# Altium PCB Rascal.PcbDoc (part 1 of 3)
Units mm, origin at the board's own origin, x right, y up, seen from the top; angles counter-clockwise.
Board outline 120.65 x 53.34 mm, 4 copper layers (Top Layer, Ground Plane, Power Plane, Bottom Layer); 125 components, 215 nets, 799 pads, 528 vias.
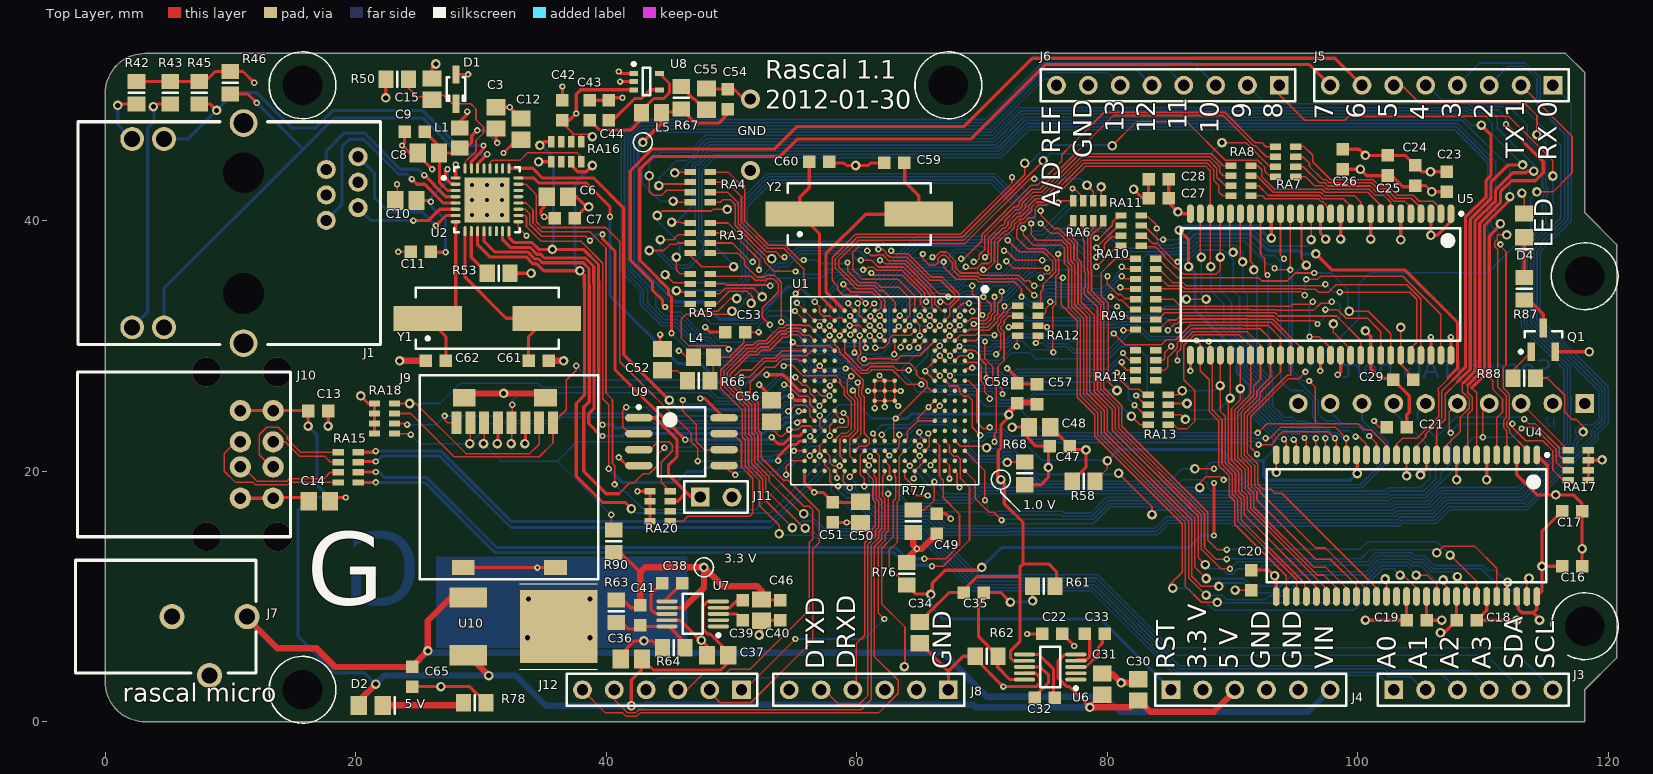
[diagram p0: Top Layer view]
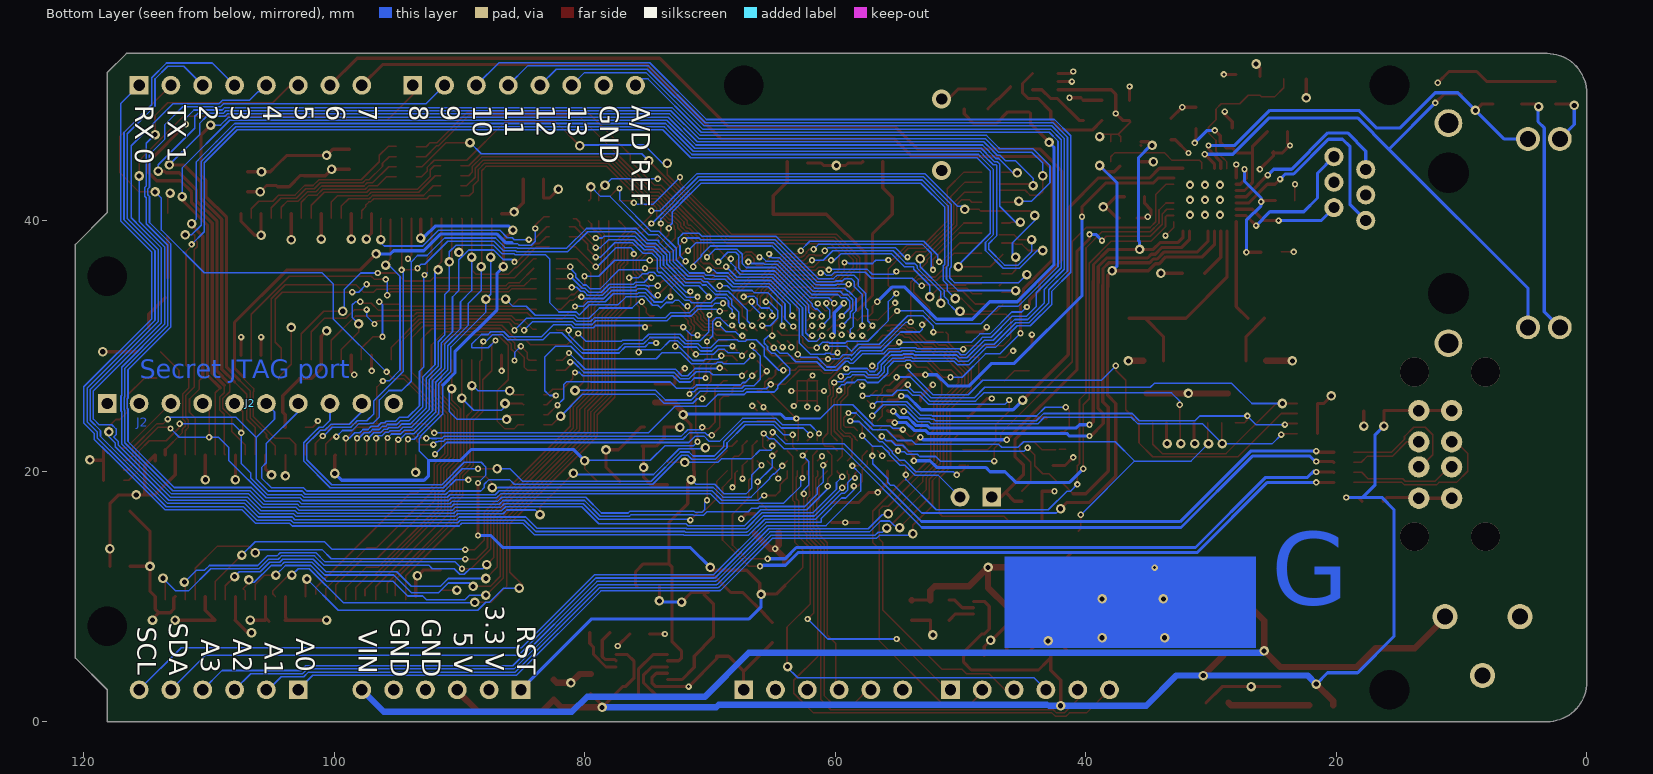
[diagram p1: Bottom Layer view, seen from below]
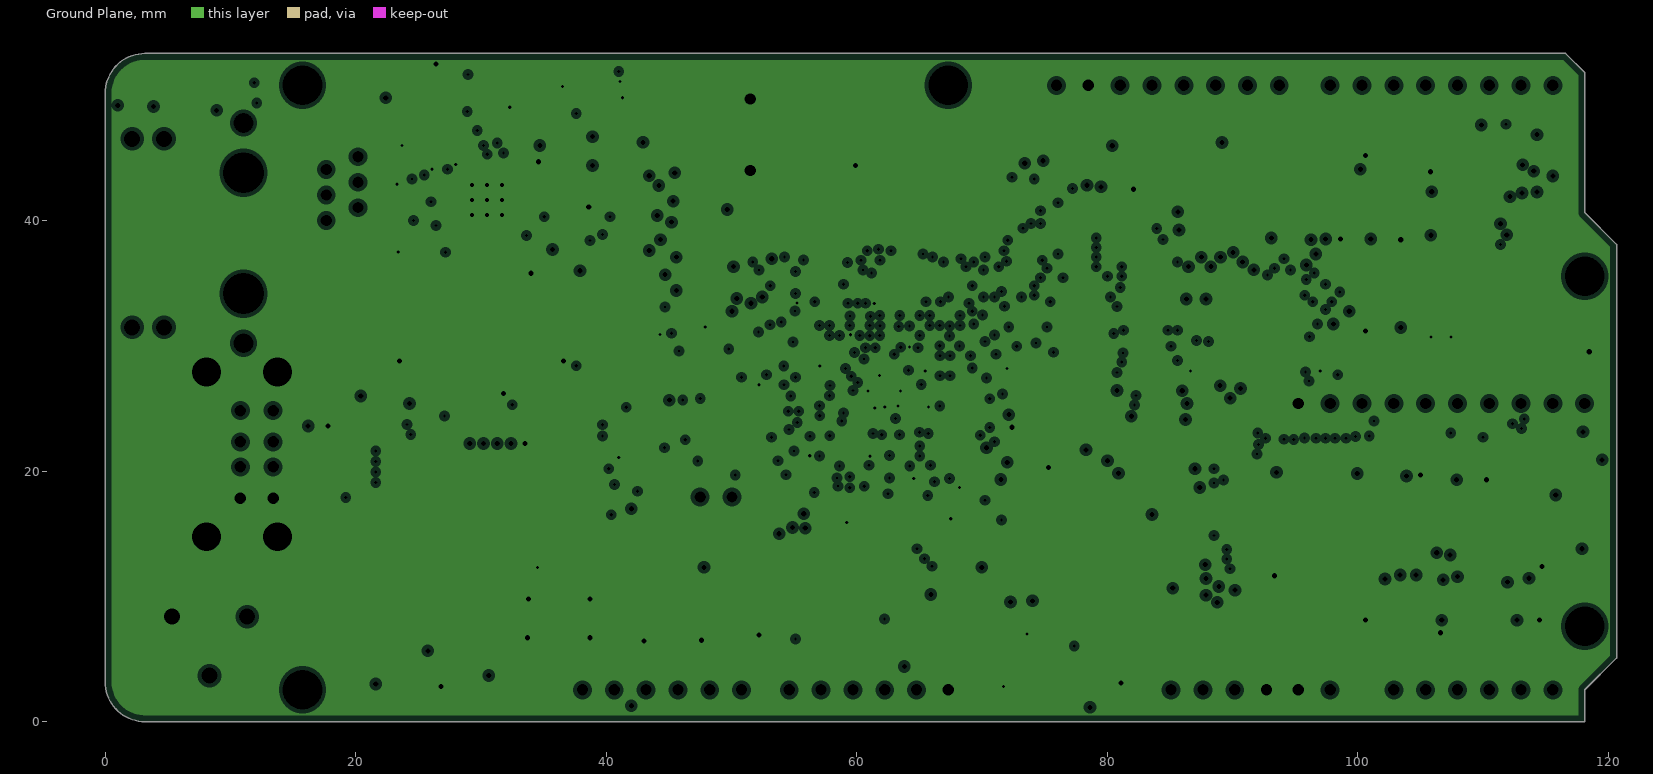
[diagram p2: Ground Plane, clearances drawn from the general rule]
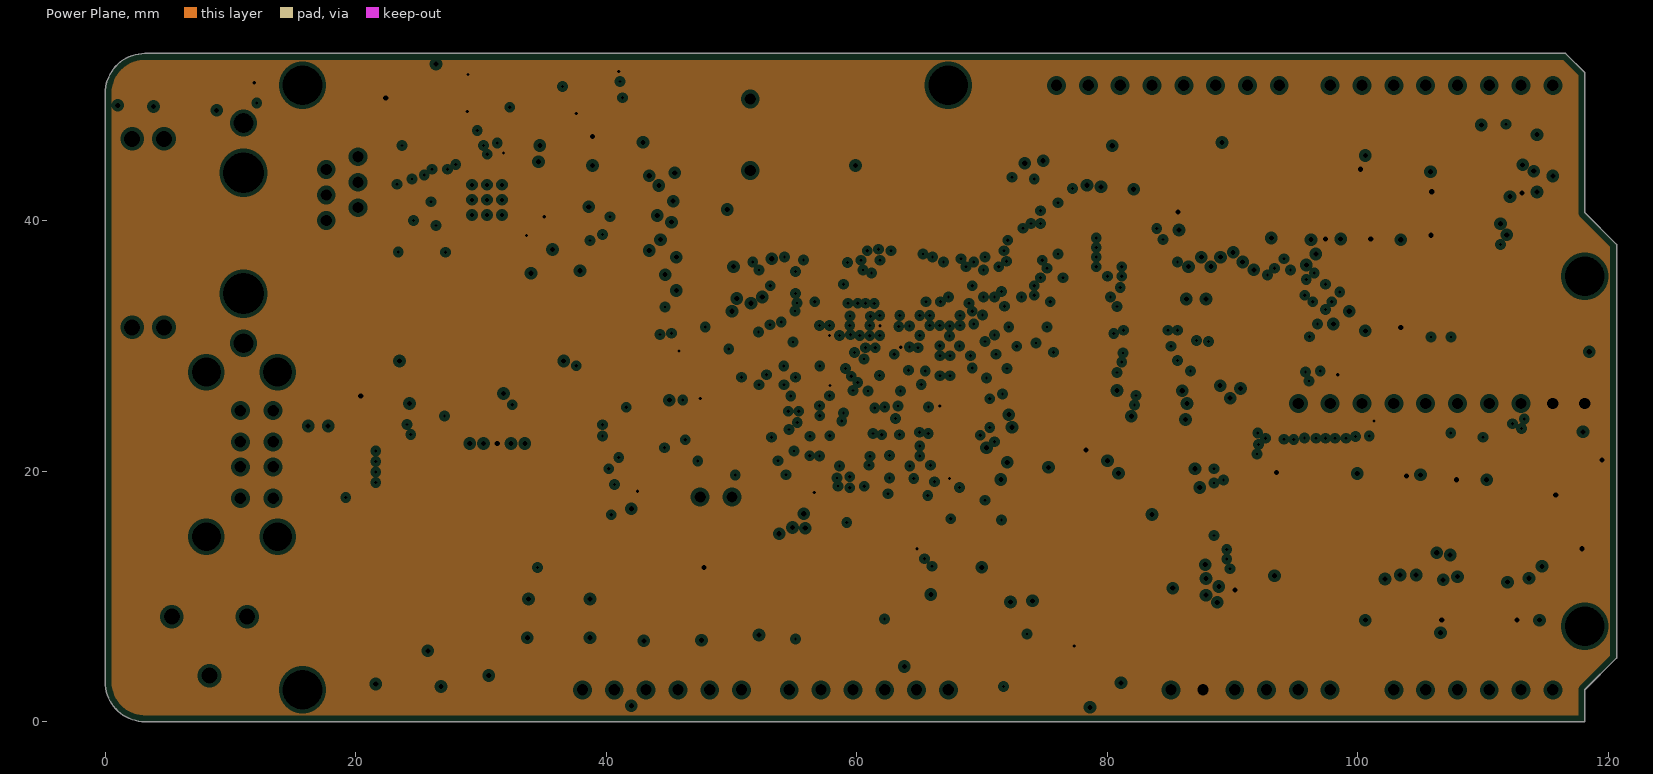
[diagram p3: Power Plane, clearances drawn from the general rule]

## Layer stack, top to bottom
Top Layer: signal copper 0.0356
Dielectric: core 0.32, FR-4, Dk 4.8
Ground Plane: plane copper 0.0356, net GND
Dielectric: prepreg 0.32, FR-4, Dk 4.8
Power Plane: plane copper 0.0356, net 3V3
Dielectric: core 0.32, FR-4, Dk 4.8
Bottom Layer: signal copper 0.0356

## Board outline
0,3.175 ccw(c3.175,3.175) 3.175,0 118.11,0 118.11,2.54 120.65,5.08 120.65,38.1 118.11,40.64 118.11,51.816 116.586,53.34 3.175,53.34 3.175,53.341 ccw(c3.175,50.166) 0,50.166

## Design rules (kind name [scope] priority, off if disabled: settings)
AssemblyTestPointUsage [All] p1: valid=2
AssemblyTestpoint [All] p1: testpointundercomponent=TRUE minsize=1.016 maxsize=2.54 preferedsize=1.524 minholesize=0 maxholesize=1.016 preferedholesize=0.813 testpointgrid=0.025 usegrid=FALSE gridtolerance=0 allowsidetop=TRUE allowsidebottom=TRUE
Clearance "Clearance~Sunstone Circuits" [All] p1: gap=0.127 // Sunstone Circuits Minimum Clearance Rule (MLB~4&6 Layer Designs)
FabricationTestPointUsage [All] p1: valid=2 allowmultiple=FALSE
FabricationTestpoint [All] p1: side=3 testpointundercomponent=TRUE minsize=1.016 maxsize=2.54 preferedsize=1.524 minholesize=0 maxholesize=2.54 preferedholesize=0.813 testpointgrid=0.025 allowsidetop=TRUE allowsidebottom=TRUE usegrid=FALSE gridtolerance=0
HoleSize "HoleSize~Sunstone Circuits" [All] p1: absolutevalues=TRUE maxlimit=6.375 minlimit=0.102 maxpercent=80.000 minpercent=20.000 // Sunstone Circuits Hole Size Rule (MLB~4&6 Layer Designs)
HoleSize Testpoint [All] p2: absolutevalues=TRUE maxlimit=2.54 minlimit=0.025 maxpercent=80.000 minpercent=20.000
HoleSize TestPointUsage [All] p3: absolutevalues=TRUE maxlimit=2.54 minlimit=0.025 maxpercent=80.000 minpercent=20.000
MinimumAnnularRing "MinimumAnnularRing~Sunstone Circuits" [All] p1: minimumring=0.127 // Sunstone Circuits Minimum Annular Ring (MLB~4&6 Layer Designs)
MinimumSolderMaskSliver [All] p1: minsoldermaskwidth=0.102
PlaneClearance "PlaneClearance~Sunstone Circuits" [All] p1: clearance=0.305 // Sunstone Circuits Power Plane Clearance Rule (MLB~4&6 Layer Designs)
PlaneConnect "PlaneConnect~Sunstone Circuits" [All] p1: planeconnectstyle=Relief reliefexpansion=0.254 reliefentries=4 reliefconductorwidth=0.203 reliefairgap=0.254 // Sunstone Circuits Power Plane Connect Rule (MLB~4&6 Layer Designs)
PolygonConnect "PolygonConnect~Sunstone Circuits" [All] p1: connectstyle=Relief reliefconductorwidth=0.203 reliefentries=4 polygonreliefangle="90 Angle" // Sunstone Circuits Polygon Connect Style (MLB~4&6 Layer Designs)
RoomDefinition BGARoom [(InComponent('U1'))] p1: confinementstyle=ConfineIn formatcopy=TRUE lockcomponents=FALSE outline 71.882,18.669 54.483,18.669 54.483,36.195 71.882,36.195
RoutingVias "RoutingVias~Sunstone Circuits" [All] p1: holewidth=0.152 width=0.432 viastyle="Through Hole" minholewidth=0.152 minwidth=0.432 maxholewidth=0.508 maxwidth=1.016 // Sunstone Circuits Routing Vias Rule (MLB~4&6 Layer Designs)
ShortCircuit "ShortCircuit~Sunstone Circuits" [All] p1: allowed=FALSE // Sunstone Circuits Short Circuit Rule~Do Not Allow (MLB~4&6 Layer Designs)
SilkscreenOverComponentPads [All] p1: minsilkscreentomaskgap=0.127
SolderMaskExpansion SolderMaskExpansion_ViasUnderBGA [WithinRoom(BGARoom) And (IsVia)] p1: expansion=-0.279
SolderMaskExpansion [All] p2: expansion=0.064 // Sunstone Circuits Solder Mask Expansion Rule (MLB~4&6 Layer Designs)
ViasUnderSMD "ViasUnderSMD~Sunstone Circuits" [All] p1: allowed=FALSE // Sunstone Circuits Vias Under SMD~Do Not Allow (MLB~4&6 Layer Designs)
Width "Width~Sunstone Circuits" [All] p1: maxlimit=2.54 minlimit=0.076 preferedwidth=0.127 // Sunstone Circuits Minimum Width Rule (MLB~4&6 Layer Designs)
18 further rules are at their usual default settings.

## Components (designator, comment, footprint, x,y, rotation, side; value= is the part's Value field where it differs from the comment)
C3 "Cap" CAPC2012N 31.2,48.2 r90 top
C6 "Cap" CAPC2012N 36.1,41.9 r0 top
C7 "Cap" CAPC1608N 36.7,40.2 r0 top
C8 "Cap" CAPC2012N 25.8,45.4 r180 top
C9 "Cap" CAPC1608N 24.7,47.1 r180 top
C10 "Cap" CAPC2012N 24,41.6 r180 top
C11 "Cap" CAPC1608N 25.2,37.5 r180 top
C12 "Cap" CAPC2012N 33.2,47.3 r90 top
C13 "Cap" CAPC1608N 17,24.8 r180 top
C14 "Cap" CAPC2012N 17.1,17.6 r0 top
C15 "Cap" CAPC2012N 26.1,50.5 r90 top
C16 "Cap" CAPC1608N 117.1,12.4 r180 top
C17 "Cap" CAPC1608N 117.1,16.8 r180 top
C18 "Cap" CAPC1608N 108.7,8.1 r180 top
C19 "Cap" CAPC1608N 104.7,8.1 r180 top
C20 "Cap" CAPC1608N 91.5,11.3 r90 top
C21 "Cap" CAPC1608N 103.1,23.5 r0 top
C22 "Cap" CAPC1608N 75.6,7 r180 top
C23 "Cap" CAPC1608N 107.1,43.1 r90 top
C24 "Cap" CAPC1608N 104.6,43.6 r90 top
C25 "Cap" CAPC1608N 102.4,44.4 r90 top
C26 "Cap" CAPC1608N 98.8,44.9 r90 top
C27 "Cap" CAPC1608N 84.1,41.8 r180 top
C28 "Cap" CAPC1608N 84.1,43.3 r180 top
C29 "Cap" CAPC1608N 103.632,27.3 r180 top
C30 "Cap" CAPC2012N 82.476,2.54 r90 top
C31 "Cap" CAPC2012N 79.6,3 r90 top
C32 "Cap" CAPC1608N 75,1.9 r0 top
C33 "Cap" CAPC1608N 79,7 r180 top
C34 "Cap" CAPC2012N 65.024,7.112 r270 top
C35 "Cap" CAPC1608N 69.342,10.308 r0 top
C36 "Cap" CAPC2012N 42,5 r180 top
C37 "Cap" CAPC2012N 48.9,5.3 r180 top
C38 "Cap" CAPC1608N 45.267,11.059 r0 top
C39 "Cap" CAPC1608N 50.9,8.9 r90 top
C40 "Cap" CAPC2012N 52.4,8.9 r270 top
C41 "Cap" CAPC1608N 42.7,8.5 r270 top
C42 "Cap" CAPC1608N 36.5,48.8 r90 top
C43 "Cap" CAPC1608N 38.7,48.8 r90 top
C44 "Cap" CAPC1608N 40.2,48.8 r90 top
C46 "Cap" CAPC1608N 53.9,8.9 r270 top
C47 "Cap" CAPC1608N 76.2,22 r0 top
C48 "Cap" CAPC2012N 74.6,23.5 r0 top
C49 "Cap" CAPC1608N 66.4,15.8 r270 top
C50 "Cap" CAPC2012N 60.3,16.7 r90 top
C51 "Cap" CAPC1608N 58.1,16.7 r90 top
C52 "Cap" CAPC2012N 44.5,28.9 r270 top
C53 "Cap" CAPC1608N 50.3,31.1 r0 top
C54 "Cap" CAPC1608N 49.7,49.7 r270 top
C55 "Cap" CAPC2012N 48,49.7 r270 top
C56 "Cap" CAPC2012N 53.2,24.8 r270 top
C57 "Cap" CAPC1608N 74.388,26.15 r270 top
C58 "Cap" CAPC1608N 72.8,26.2 r270 top
C59 "Cap" CAPC1608N 63,44.6 r0 top
C60 "Cap" CAPC1608N 57,44.7 r180 top
C61 "Cap" CAPC1608N 34.6,28.8 r0 top
C62 "Cap" CAPC1608N 26.4,28.8 r180 top
C65 "Cap" CAPC1608N 24.5,3.6 r90 top
D1 "Diode 1N4148" SOD-323 28,50.5 r270 top
D2 "LED2" CD2012-0805 21.2,1.3 r0 top
D4 "LED" CD2012-0805 113.284,39.624 r270 top
J1 "L829-1X1T-91" "BEL L829-1X1T-91" 11.045,39 r90 top locked
J2 "ARM JTAG HEADER" HDR1X10 118.11,25.4 r180 bottom locked
J3 "ARDUINO_ANALOG_IN" HDR1X6 102.87,2.54 r0 top locked
J4 "ARDUINO_SHIELD_POWER" HDR1X6 85.09,2.54 r0 top locked
J5 "ARDUINO_DIGITAL_LOW_BYTE" HDR1X8 115.57,50.8 r180 top locked
J6 "ARDUINO_DIGITAL_HIGH_BYTE" HDR1X8 93.726,50.8 r180 top locked
J7 "Center-positive 2.1 mm power jack" PJ-102AH 11.328,8.382 r90 top locked
J8 "SERIAL DEBUG PORT" HDR1X6 67.31,2.54 r180 top
J9 "MICROSD_SOCKET" "JAE SJ107021" 31.9,12.3 r270 top locked
J10 "72309-8034BLF" 72309-8034BLF -2.2,21.336 r270 top locked
J11 "Serial flash CS enable" HDR1X2 47.498,17.928 r0 top
J12 "SSC PORT" HDR1X6 50.8,2.54 r180 top
L1 "Inductor" INDC2012L 28.3,46.6 r270 top
L4 "Inductor" INDC2012L 47.756,29.1 r0 top
L5 "Inductor" INDC2012L 43.6,48.6 r0 top
Q1 "2N3904" SOT23-3N 114.808,30.48 r90 top
R42 "Res3" RESC2012N 2.5,50.2 r90 top
R43 "Res3" RESC2012N 5.2,50.2 r90 top
R45 "Res3" RESC2012N 7.5,50.2 r90 top
R46 "Res3" RESC2012N 10,51 r90 top
R50 "Res3" RESC2012N 23.3,51.3 r180 top
R53 "Res3" RESC2012N 31.4,35.8 r0 top
R58 "Res3" RESC2012N 78.1,19.198 r0 top
R61 "Res3" RESC2012N 74.93,10.816 r180 top
R62 "Res3" RESC2012N 70.358,5.228 r180 top
R63 "Res3" RESC2012N 40.8,8.8 r270 top
R64 "Res3" RESC2012N 45.4,5.9 r180 top
R66 "Res3" RESC2012N 47.4,27.2 r180 top
R67 "Res3" RESC2012N 46,49.8 r90 top
R68 "Res3" RESC2012N 73.406,19.812 r90 top
R76 "Res3" RESC2012N 64,11.8 r270 top
R77 "Res3" RESC2012N 64.5,16 r90 top
R78 "Res3" RESC2012N 29.5,1.5 r0 top
R87 "Res3" RESC2012N 113.284,34.544 r270 top
R88 "Res3" RESC2012N 113.284,27.432 r180 top
R90 "Res3" RESC2012N 40.6,14.4 r90 top
RA3 "RESISTOR ARRAY" 742C083 47.498,38.608 r90 top
RA4 "RESISTOR ARRAY" 742C083 47.498,42.672 r90 top
RA5 "RESISTOR ARRAY" 742C083 47.498,34.544 r90 top
RA6 "RESISTOR ARRAY" 742C083 78.486,40.788 r180 top
RA7 "RESISTOR ARRAY" 742C083 94.234,44.704 r270 top
RA8 "RESISTOR ARRAY" 742C083 90.678,43.18 r270 top
RA9 "RESISTOR ARRAY" 742C083 83.058,32.512 r270 top
RA10 "RESISTOR ARRAY" 742C083 83.058,35.744 r270 top
RA11 "RESISTOR ARRAY" 742C083 81.9,39.2 r270 top
RA12 "RESISTOR ARRAY" 742C083 73.66,32.004 r270 top
RA13 "RESISTOR ARRAY" 742C083 84.074,24.892 r270 top
RA14 "RESISTOR ARRAY" 742C083 83.058,28.448 r270 top
RA15 "RESISTOR ARRAY" 742C083 19.4,20.3 r270 top
RA16 "RESISTOR ARRAY" 742C083 36.8,45.5 r180 top
RA17 "RESISTOR ARRAY" 742C083 117.602,20.468 r90 top
RA18 "RESISTOR ARRAY" 742C083 22.3,24.2 r270 top
RA20 "RESISTOR ARRAY" 742C083 44.3,17.2 r270 top
U1 "AT91SAM9G20B-CU" AT91SAM9G20-CU 62.23,26.416 r270 top locked
U2 "KSZ8051RNL" QFN50P500X500-32VBN 30.48,41.656 r0 top
U4 "MT48LCxxMxxA2x-xx" TSOP2-54_N 103.886,15.642 r270 top locked
U5 "MT48LCxxMxxA2x-xx" TSOP2-54_N 97.028,34.9 r270 top locked
U6 "TPS60500" TSSOP50P490-10AN 75.438,4.364 r180 top
U7 "TPS60500" TSSOP50P490-10AN 46.9,8.6 r180 top
U8 "TPS717xx" SOT353-5AN 43.222,51.094 r0 top
U9 "MX25L3205D" SOP127P780-8N 46,22.352 r0 top locked
U10 "Volt Reg" DPAK-3 29,7.6 r270 top
Y1 "XTAL" HC49/4H_SMX 30.5,32.2 r0 top
Y2 "18.432 MHz" HC49/4H_SMX 60.198,40.513 r0 top

## Footprints (in the part's own frame and the unit in brackets; to place one, negate y for a bottom-side part, rotate by r counter-clockwise, add the part's x,y. Pads: shape width x height; smd on the part's side, far side on the other; paste and mask are expansions set on the pad)
742C083 [mm] "Resistor array"
  rect 0.5x0.9 smd mask+0.025: 1(-1.2,-0.8) 2(-0.4,-0.8) 3(0.4,-0.8) 4(1.2,-0.8) 5(1.2,0.8) 6(0.4,0.8) 7(-0.4,0.8) 8(-1.2,0.8)
72309-8034BLF [mm] "USB doubler decker jack"
  round 1.7 hole 0.92: 1(-3.5,15.61) 2(-1,15.61) 3(1,15.61) 4(3.5,15.61) 5(-3.5,12.99) 6(-1,12.99) 7(1,12.99) 8(3.5,12.99)
  silkscreen extent -6.57,0 6.57,17, body extent -6.5,0 6.5,17, height 15.5
AT91SAM9G20-CU [mil] "217-ball, 15 x 15 mm LFBGA package, 0.8 mm pitch"
  round 14 smd mask-1.09: A1(-251.97,251.97) A2(-220.47,251.97) A3(-188.98,251.97) A4(-157.48,251.97) A5(-125.98,251.97) A6(-94.49,251.97) A7(-62.99,251.97) A8(-31.5,251.97) A9(0,251.97) A10(31.5,251.97) A11(62.99,251.97) A12(94.49,251.97) A13(125.98,251.97) A14(157.48,251.97) A15(188.98,251.97) A16(220.47,251.97) A17(251.97,251.97) B1(-251.97,220.47) B2(-220.47,220.47) B3(-188.98,220.47) B4(-157.48,220.47) B5(-125.98,220.47) B6(-94.49,220.47) B7(-62.99,220.47) B8(-31.5,220.47) B9(0,220.47) B10(31.5,220.47) B11(62.99,220.47) B12(94.49,220.47) B13(125.98,220.47) B14(157.48,220.47) B15(188.98,220.47) B16(220.47,220.47) B17(251.97,220.47) C1(-251.97,188.98) C2(-220.47,188.98) C3(-188.98,188.98) C4(-157.48,188.98) C5(-125.98,188.98) C6(-94.49,188.98) C7(-62.99,188.98) C8(-31.5,188.98) C9(0,188.98) C10(31.5,188.98) C11(62.99,188.98) C12(94.49,188.98) C13(125.98,188.98) C14(157.48,188.98) C15(188.98,188.98) C16(220.47,188.98) C17(251.97,188.98) D1(-251.97,157.48) D2(-220.47,157.48) D3(-188.98,157.48) D4(-157.48,157.48) D5(-125.98,157.48) D6(-94.49,157.48) D7(-62.99,157.48) D8(-31.5,157.48) D9(0,157.48) D10(31.5,157.48) D11(62.99,157.48) D12(94.49,157.48) D13(125.98,157.48) D14(157.48,157.48) D15(188.98,157.48) D16(220.47,157.48) D17(251.97,157.48) E1(-251.97,125.98) E2(-220.47,125.98) E3(-188.98,125.98) E4(-157.48,125.98) E14(157.48,125.98) E15(188.98,125.98) E16(220.47,125.98) E17(251.97,125.98) F1(-251.97,94.49) F2(-220.47,94.49) F3(-188.98,94.49) F4(-157.48,94.49) F14(157.48,94.49) F15(188.98,94.49) F16(220.47,94.49) F17(251.97,94.49) G1(-251.97,62.99) G2(-220.47,62.99) G3(-188.98,62.99) G4(-157.48,62.99) G14(157.48,62.99) G15(188.98,62.99) G16(220.47,62.99) G17(251.97,62.99) H1(-251.97,31.5) H2(-220.47,31.5) H3(-188.98,31.5) H4(-157.48,31.5) H8(-31.5,31.5) H9(0,31.5) H10(31.5,31.5) H14(157.48,31.5) H15(188.98,31.5) H16(220.47,31.5) H17(251.97,31.5) J1(-251.97,0) J2(-220.47,0) J3(-188.98,0) J4(-157.48,0) J8(-31.5,0) J9(0,0) J10(31.5,0) J14(157.48,0) J15(188.98,0) J16(220.47,0) J17(251.97,0) K1(-251.97,-31.5) K2(-220.47,-31.5) K3(-188.98,-31.5) K4(-157.48,-31.5) K8(-31.5,-31.5) K9(0,-31.5) K10(31.5,-31.5) K14(157.48,-31.5) K15(188.98,-31.5) K16(220.47,-31.5) K17(251.97,-31.5) L1(-251.97,-62.99) L2(-220.47,-62.99) L3(-188.98,-62.99) L4(-157.48,-62.99) L14(157.48,-62.99) L15(188.98,-62.99) L16(220.47,-62.99) L17(251.97,-62.99) M1(-251.97,-94.49) M2(-220.47,-94.49) M3(-188.98,-94.49) M4(-157.48,-94.49) M14(157.48,-94.49) M15(188.98,-94.49) M16(220.47,-94.49) M17(251.97,-94.49) N1(-251.97,-125.98) N2(-220.47,-125.98) N3(-188.98,-125.98) N4(-157.48,-125.98) N14(157.48,-125.98) N15(188.98,-125.98) N16(220.47,-125.98) N17(251.97,-125.98) P1(-251.97,-157.48) P2(-220.47,-157.48) P3(-188.98,-157.48) P4(-157.48,-157.48) P5(-125.98,-157.48) P6(-94.49,-157.48) P7(-62.99,-157.48) P8(-31.5,-157.48) P9(0,-157.48) P10(31.5,-157.48) P11(62.99,-157.48) P12(94.49,-157.48) P13(125.98,-157.48) P14(157.48,-157.48) P15(188.98,-157.48) P16(220.47,-157.48) P17(251.97,-157.48) R1(-251.97,-188.98) R2(-220.47,-188.98) R3(-188.98,-188.98) R4(-157.48,-188.98) R5(-125.98,-188.98) R6(-94.49,-188.98) R7(-62.99,-188.98) R8(-31.5,-188.98) R9(0,-188.98) R10(31.5,-188.98) R11(62.99,-188.98) R12(94.49,-188.98) R13(125.98,-188.98) R14(157.48,-188.98) R15(188.98,-188.98) R16(220.47,-188.98) R17(251.97,-188.98) T1(-251.97,-220.47) T2(-220.47,-220.47) T3(-188.98,-220.47) T4(-157.48,-220.47) T5(-125.98,-220.47) T6(-94.49,-220.47) T7(-62.99,-220.47) T8(-31.5,-220.47) T9(0,-220.47) T10(31.5,-220.47) T11(62.99,-220.47) T12(94.49,-220.47) T13(125.98,-220.47) T14(157.48,-220.47) T15(188.98,-220.47) T16(220.47,-220.47) T17(251.97,-220.47) U1(-251.97,-251.97) U2(-220.47,-251.97) U3(-188.98,-251.97) U4(-157.48,-251.97) U5(-125.98,-251.97) U6(-94.49,-251.97) U7(-62.99,-251.97) U8(-31.5,-251.97) U9(0,-251.97) U10(31.5,-251.97) U11(62.99,-251.97) U12(94.49,-251.97) U13(125.98,-251.97) U14(157.48,-251.97) U15(188.98,-251.97) U16(220.47,-251.97) U17(251.97,-251.97)
  silkscreen extent -323,-295 295,319, body extent -299,-299 299,299, height 55
"BEL L829-1X1T-91" [mil] "Bel L829-1X1T-91 RJ45 jack"
  round 60 hole 128: 0(190,0) 1(-190,0)
  round 87 hole 62: 2(346,0) 3(-346,0)
  round 60 hole 35: 4(40,-260) 5(120,-260) 6(200,-260) 10(80,-360) 11(160,-360) 12(240,-360)
  round 75 hole 50: 13(-296,250) 14(-296,350) 15(296,250) 16(296,350)
  silkscreen extent -350,-430 350,520, body extent -350,-435 350,525, height 453
CAPC1608N [mm] "Chip Capacitor, Body 1.6x0.8mm, IPC Medium Density"
  rect 1x1 smd: 1(-0.8,0) 2(0.8,0)
  body extent -0.87,-0.48 0.87,0.48, height 0.85
CAPC2012N [mm] "Chip Capacitor, Body 2.0x1.3mm, IPC Medium Density"
  rect 1.3x1.5 smd: 1(-0.85,0) 2(0.85,0)
  body extent -1.1,-0.72 1.1,0.72, height 1.1
CD2012-0805 [mm] "Chip Diode; Body 2.0 x 1.3 mm (LxW typ)"
  rect 1.3x1.5 smd: 1(-0.95,0) 2(0.95,0)
  silkscreen extent 1.9,-0.65 1.9,0.65
DPAK-3 [mm] "Case 369C-01 for MC78xx regulators"
  rect 1.6x3 smd: 1(-2.3,0) 3(2.3,0)
  rect 5.8x6.2 smd: 2(0,7.2)
  silkscreen extent -3.4,4.1 3.4,10.3, body extent -3.4,4.1 3.4,10.3, height 2.38
HC49/4H_SMX [mm] "Quartz Crystal, SM; Body 13.4 (inc. leads) x 4.9 mm (LxW max)"
  rect 5.5x2 smd: 1(-4.75,0) 2(4.75,0)
  silkscreen extent -5.7,-2.45 5.7,2.45
HDR1X2 [mm] "Connector; Header; 2 Position"
  rect 1.5x1.5 hole 0.9: 1(0,0)
  round 1.5 hole 0.9: 2(2.54,0)
  silkscreen extent -1.27,-1.27 3.81,1.27
HDR1X6 [mm]
  rect 1.5x1.5 hole 0.9: 1(0,0)
  round 1.5 hole 0.9: 2(2.54,0) 3(5.08,0) 4(7.62,0) 5(10.16,0) 6(12.7,0)
  silkscreen extent -1.27,-1.27 13.97,1.27, body extent -1.28,-1.27 13.98,1.26, height 8.5
HDR1X8 [mm]
  rect 1.5x1.5 hole 0.9: 1(0,0)
  round 1.5 hole 0.9: 2(2.54,0) 3(5.08,0) 4(7.62,0) 5(10.16,0) 6(12.7,0) 7(15.24,0) 8(17.78,0)
  silkscreen extent -1.27,-1.27 19.05,1.27, body extent -1.3,-1.3 19.04,1.25, height 8.5
HDR1X10 [mm] "Connector; Header; 10 Position"
  rect 1.5x1.5 hole 0.9: 1(0,0)
  round 1.5 hole 0.9: 2(2.54,0) 3(5.08,0) 4(7.62,0) 5(10.16,0) 6(12.7,0) 7(15.24,0) 8(17.78,0) 9(20.32,0) 10(22.86,0)
INDC2012L [mm] "Chip Inductor, Body 2.0x1.2mm, IPC High Density"
  rect 1.2x1.4 smd: 1(-0.8,0) 2(0.8,0)
  body extent -1.1,-0.7 1.1,0.7, height 0.55
"JAE SJ107021" [mm] "MicroSD card socket"
  rect 1.8x0.8 smd: 1(-11.55,-3.85) 2(-11.55,-2.75) 3(-11.55,-1.65) 4(-11.55,-0.55) 5(-11.55,0.55) 6(-11.55,1.65) 7(-11.55,2.75) 8(-11.55,3.85)
  rect 1.2x1.8 smd: 9(0,-3.3) 10(0,4.05)
  rect 1.4x1.8 smd: 11(-13.55,-3.25) 12(-13.55,3.25)
  silkscreen extent -15.35,-6.8 0.95,7.45, body extent -15.25,-6.75 1,7.5, height 2
PJ-102AH [mm] "Center positive 2.1 mm power jack"
  round 2 hole 1.27: 1(0,0) 2(0,6) 3(-4.7,3)
  silkscreen extent -4.5,-0.7 4.5,13.7, body extent -5.8,-0.7 4.5,13.7, height 11
QFN50P500X500-32VBN [mm] "32-Pin Plastic Quad Flat No-Lead 0.5 mm Pitch"
  oval 0.8x0.25 smd: 1(-2.5,1.75) 2(-2.5,1.25) 3(-2.5,0.75) 4(-2.5,0.25) 5(-2.5,-0.25) 6(-2.5,-0.75) 7(-2.5,-1.25) 8(-2.5,-1.75) 17(2.5,-1.75) 18(2.5,-1.25) 19(2.5,-0.75) 20(2.5,-0.25) 21(2.5,0.25) 22(2.5,0.75) 23(2.5,1.25) 24(2.5,1.75)
  oval 0.25x0.8 smd: 9(-1.75,-2.5) 10(-1.25,-2.5) 11(-0.75,-2.5) 12(-0.25,-2.5) 13(0.25,-2.5) 14(0.75,-2.5) 15(1.25,-2.5) 16(1.75,-2.5) 25(1.75,2.5) 26(1.25,2.5) 27(0.75,2.5) 28(0.25,2.5) 29(-0.25,2.5) 30(-0.75,2.5) 31(-1.25,2.5) 32(-1.75,2.5)
  rect 3.6x3.6 smd: 33(0,0)
  silkscreen extent -3.57,-2.6 2.6,2.6, body extent -2.58,-2.58 2.58,2.58, height 1
RESC2012N [mm] "Chip Resistor, Body 2.0x1.2mm, IPC Medium Density"
  rect 1.2x1.4 smd: 1(-0.9,0) 2(0.9,0)
  silkscreen extent 0,-0.6 0,0.6, body extent -1.07,-0.7 1.07,0.7, height 0.7
SOD-323 [mm] "SOD-323/SC-76; 2 Leads; Body 1.7 x 1.3 mm, (LxW)"
  rect 1.45x0.55 smd: 1(1.175,0) 2(-1.175,0)
  silkscreen extent -0.95,-0.75 0.95,0.75
SOP127P780-8N [mm] "SOP, 8-Leads, Body 5.3x5.3mm, Pitch 1.27mm, IPC Medium Density"
  oval 2.2x0.6 smd: 1(-3.4,1.905) 2(-3.4,0.635) 3(-3.4,-0.635) 4(-3.4,-1.905) 5(3.4,-1.905) 6(3.4,-0.635) 7(3.4,0.635) 8(3.4,1.905)
  silkscreen extent -3.52,-2.75 1.9,2.88, body extent -2.73,-2.75 2.73,2.75, height 2.03
SOT23-3N [mm] "SOT23, 3-Leads, Body 2.9x1.3mm, Pitch 0.95mm, Lead Span 2.5mm, IPC Medium Density"
  rect 1.5x0.6 smd: 1(-0.95,0.95) 2(-0.95,-0.95) 3(0.95,0)
  silkscreen extent -1.07,-1.5 0.7,1.92, body extent -0.7,-1.5 0.7,1.5, height 1.1
SOT353-5AN [mm] "SOT353, 5-Leads, Body 2x1.3mm, Pitch 0.65mm, Lead Span 2.1mm, IPC Medium Density"
  rect 0.7x0.4 smd: 1(-1.025,0.65) 2(-1.025,0) 3(-1.025,-0.65) 4(1.025,-0.65) 5(1.025,0.65)
  silkscreen extent -1.15,-1.1 0.3,1.52, body extent -0.7,-1.1 0.7,1.1, height 1.1
TSOP2-54_N [mm] "SOP, 54-Leads, Body 22.2x10.16mm, Pitch 0.8mm, IPC Medium Density"
  oval 1.5x0.55 smd: 1(-5.65,10.4) 2(-5.65,9.6) 3(-5.65,8.8) 4(-5.65,8) 5(-5.65,7.2) 6(-5.65,6.4) 7(-5.65,5.6) 8(-5.65,4.8) 9(-5.65,4) 10(-5.65,3.2) 11(-5.65,2.4) 12(-5.65,1.6) 13(-5.65,0.8) 14(-5.65,0) 15(-5.65,-0.8) 16(-5.65,-1.6) 17(-5.65,-2.4) 18(-5.65,-3.2) 19(-5.65,-4) 20(-5.65,-4.8) 21(-5.65,-5.6) 22(-5.65,-6.4) 23(-5.65,-7.2) 24(-5.65,-8) 25(-5.65,-8.8) 26(-5.65,-9.6) 27(-5.65,-10.4) 28(5.65,-10.4) 29(5.65,-9.6) 30(5.65,-8.8) 31(5.65,-8) 32(5.65,-7.2) 33(5.65,-6.4) 34(5.65,-5.6) 35(5.65,-4.8) 36(5.65,-4) 37(5.65,-3.2) 38(5.65,-2.4) 39(5.65,-1.6) 40(5.65,-0.8) 41(5.65,0) 42(5.65,0.8) 43(5.65,1.6) 44(5.65,2.4) 45(5.65,3.2) 46(5.65,4) 47(5.65,4.8) 48(5.65,5.6) 49(5.65,6.4) 50(5.65,7.2) 51(5.65,8) 52(5.65,8.8) 53(5.65,9.6) 54(5.65,10.4)
  silkscreen extent -5.77,-11.15 4.5,11.35, body extent -5.12,-11.15 5.12,11.15, height 1.2
TSSOP50P490-10AN [mm] "TSSOP, 10-Leads, Body 3x3mm, Pitch 0.5mm, IPC Medium Density"
  oval 1.7x0.3 smd: 1(-2.05,1) 2(-2.05,0.5) 3(-2.05,0) 4(-2.05,-0.5) 5(-2.05,-1) 6(2.05,-1) 7(2.05,-0.5) 8(2.05,0) 9(2.05,0.5) 10(2.05,1)
  silkscreen extent -2.17,-1.6 0.8,1.82, body extent -1.6,-1.6 1.6,1.6, height 1.1

## Part data
C3 C6 C7 C8 C9 C10 C11 C12 C13 C14 C15 C16 C17 C18 C19 C20 C21 C22 C23 C24 C25 C26 C27 C28 C29 C30 C31 C32 C33 C34 C35 C36 C37 C38 C39 C40 C41 C42 C43 C44 C46 C47 C48 C49 C50 C51 C52 C53 C54 C55 C56 C57 C58 C59 C60 C61 C62 C65: "Capacitor"
D1: "Diode"
D2: "Green LED"
D4: library part LED2, "Green LED"
J1: "RJ45 jack"
J2: "Secret JTAG port"
J3 J4: "6-pin socket"
J5 J6: "8-pin socket"
J7: library part PWR2.5, "Power jack"
J8 J12: library part ARDUINO_ANALOG_IN, "6-pin socket"
J9: "MicroSD card socket"
J10: "USB double decker jack"
J11: library part JUMPER, "2-pin jumper"
Q1: "NPN transistor"
R42 R43 R45 R46 R50 R53 R58 R61 R62 R63 R64 R66 R67 R68 R76 R77 R78 R87 R88 R90: "Resistor"
RA3 RA4 RA5 RA6 RA7 RA8 RA9 RA10 RA11 RA12 RA13 RA14 RA15 RA16 RA17 RA18 RA20: "Resistor array"
U1: "Microcontroller"
U2: "Ethernet transceiver"
U4 U5: "SDRAM"
U6 U7: "Step-down charge pump"
U8: "Low-dropout regulator"
U9: "Serial flash"
U10: library part "VOLT REG", "Voltage regulator"
Y1: "Crystal Oscillator"
Y2: library part XTAL, "Crystal"

## Free pads (board coordinates)
  round 1.524 hole 3.175 unplated: NPTH(15.748,2.54) NPTH(15.748,50.8) NPTH(67.31,50.8) NPTH(118.11,7.62) NPTH(118.11,35.56)

## Via types
v1: diameter 0.508, hole 0.254, Top Layer to Bottom Layer, 343 vias
v2: diameter 0.762, hole 0.406, Top Layer to Bottom Layer, 170 vias
v3: diameter 0.66, hole 0.33, Top Layer to Bottom Layer, tented top, 9 vias
v4: diameter 2.3, hole 2.3, Top Layer to Bottom Layer, 4 vias
v5: diameter 1.524, hole 0.889, Top Layer to Bottom Layer, 2 vias

## Nets (pads, with @x,y where several pads share a name; then routed paths per layer and width w, separated by ;. In a path a pad name is that pad's centre, name@x,y a point inside that pad or via, vN(x,y) a via of type N, cw(c..) or ccw(c..) an arc to the next point about the centre after c; other vN are vias at no path point)
1V0: C34.1 C35.1 C56.2 C57.2 C58.2 R61.1 U1.D9 U1.D16 U1.H14 U1.M1 U1.T13 U6.7 | length 89.5
  Top Layer w0.127: C56.2@53.086,23.95 53.086,23.516 53.802,22.8 54.1,22.8 54.6,23.3 55.3,23.3 55.6,23.6 56.246,23.6 U1.T13@56.63,23.216 ; v1@59.293,33.312 59.789,32.816 U1.M1@59.83,32.816 ; v1(60.236,30.818) 60.236,29.68 60.325,29.591 60.325,29.337 60.071,29.083 60.071,28.829 60.452,28.448 60.801,28.448 60.961,28.608 64.229,28.608 64.77,28.067 64.77,27.686 65.062,27.394 65.31,27.394 65.619,27.085 65.619,26.719 ; U1.H14@63.03,22.416 62.939,22.507 62.939,24.039 v1(63.1,24.2) 65.619,26.719 ; v1(65.888,20.468) 66.23,20.81 U1.D16@66.23,20.816 ; U1.D9@66.23,26.416 65.922,26.416 65.619,26.719 ; v2@72.136,24.307 v2(72.136,24.511)
  Top Layer w0.254: C34.1@65.024,7.912 65.674,8.562 65.638,8.562 67.384,10.308 68.325,10.308 69.595,11.578 73.025,11.578 ; v2@72.136,24.307 71.628,23.799 71.628,23.793 71.501,23.666 71.501,21.808 71.3,21.607 71.3,20.072 71.247,20.019 71.247,19.579 v2(71.501,19.325) 71.766,19.06 71.766,17.409 73.279,15.896 73.279,12.594 ; U6.7@73.388,4.864 72.5,4.864 72.263,5.101 72.263,5.609 73.025,6.371 73.025,11.578 ; R61.1@75.83,10.816 75.946,10.932 75.946,11.959 75.311,12.594 73.279,12.594 ; 73.025,11.578 73.025,12.34 73.279,12.594
  Top Layer w0.508: v2@72.21,24.585 72.21,24.786 72.898,25.474 C57.2@74.388,25.474
  Bottom Layer w0.127: v1@54.6,23.3 54.715,23.415 55.415,23.415 55.618,23.618 56.918,23.618 58.6,25.3 60.1,25.3 61.2,24.2 v1(63.1,24.2) ; v1(65.888,20.468) 66.675,19.681 66.675,18.625 67.118,18.182 68.855,18.182 69.617,18.944 71.12,18.944 v2(71.501,19.325) ; v2@71.996,24.575 72.034,24.613 v2(72.136,24.511)
  Bottom Layer w0.254: v1(59.309,33.401) 60.071,32.639 60.071,30.988 v1@60.198,30.861 ; v1(63.1,24.2) 64,24.2 64.362,24.562 71.984,24.562 v2@71.996,24.575
  other v1: 54.6,23.313
1V0PLL: C54.2 L5.2 R67.1 U1.N2 U1.P2 | length 40.1
  Top Layer w0.127: v1(56.642,33.528) 57.023,33.147 57.023,32.639 57.277,32.385 57.861,32.385 U1.P2@58.23,32.016 58.472,32.258 58.788,32.258 U1.N2@59.03,32.016
  Top Layer w0.254: v2(42.926,46.249) 44.4,47.723 L5.2@44.4,48.6 ; L5.2@44.53,48.681 46.219,48.681 47.119,47.781 48.966,47.781 49.7,48.515 C54.2@49.7,48.9
  Bottom Layer w0.254: v2(42.926,46.249) 42.534,45.857 42.534,36.462 45.468,33.528 47.665,33.528 49.062,32.131 51.887,32.131 54.448,34.692 55.478,34.692 v1(56.642,33.528)
3V3: C6.1 C7.1 C12.1 C16.1 C17.1 C18.1 C19.1 C20.1 C21.1 C22.1 C23.1 C24.1 C25.1 C26.1 C27.1 C28.1 C29.1 C40.1 C41.1 C42.1 C46.1 C47.2 C48.2 C49.2 C50.2 C51.2 D1.2 D4.1 J2.1 J2.2 J4.2 J9.4 L1.1 L4.1 R42.2 R43.2 R45.2 R46.2 R50.2 R58.1 R63.1 R76.1 R77.1 R90.1 RA16.1 RA16.2 RA17.1 RA17.2 RA17.3 RA17.4 RA18.1 RA18.2 RA18.3 RA18.4 RA20.1 RA20.2 RA20.3 RA20.4 U1.C16 U1.D11 U1.G4 U1.J3 U1.P8 U1.R4 U1.U17 U2.17 U4.1 U4.3 U4.9 U4.14 U4.27 U4.43 U4.49 U5.1 U5.3 U5.9 U5.14 U5.27 U5.43 U5.49 U7.7 U8.1 U8.3 U9.8 | length 161.1
  Top Layer w0.127: U2.17@32.98,39.906 32.98,39.45 v1(33.63,38.8) ; C42.1@36.4,47.9 37.4,46.9 ; RA16.2@37.2,46.3 37.2,46.7 37.4,46.9 ; RA16.1@38,46.3 38,46.8 37.9,46.9 ; v2(38.9,46.7) 38.7,46.9 37.9,46.9 ; v1(45.8,29.6) 45.9,29.6 46.4,29.1 L4.1@46.956,29.1 ; U1.R4@57.43,30.416 57.8,30.786 v1@57.8,30.8 ; v1@57.847,26.833 U1.P8@58.23,27.216 ; v1@61.8,31.6 v1(61.846,31.6) U1.J3@62.23,31.216 ; v1(63.516,29.884) 63.516,30.102 U1.G4@63.83,30.416 ; U1.D11@66.23,24.816 v1(66.62,25.21) v1@66.6,25.2 ; U1.C16@67.03,20.816 67.4,20.446 v1(67.4,19.4) ; v2@90.4,10.5 C20.1@91.5,10.5 ; U4.27@93.486,21.292 93.486,19.914 v2(93.5,19.9) ; v1(101.3,24) 101.3,23.9 101.7,23.5 C21.1@102.3,23.5 ; v2(103.428,31.472) U5.49@103.428,29.25 103.428,28.522 104.432,27.518 C29.1@104.432,27.3 ; U4.14@103.886,21.292 v2(103.886,19.614) v2@103.9,19.6 ; v2(113.1,42.2) 113.284,42.016 D4.1@113.284,40.574 ; 37.4,46.9 37.9,46.9
  Top Layer w0.254: R42.2@2.5,51.1 R43.2@5.2,51.1 R45.2@7.5,51.1 ; R45.2@7.5,51.1 8,51.1 8.8,51.9 R46.2@10,51.9 11,51.9 v1(11.9,51) ; v2(20.4,26) 21,25.4 RA18.1@21.5,25.4 RA18.2@21.5,24.6 RA18.3@21.5,23.8 RA18.4@21.5,23 ; v2(22.4,49.8) R50.2@22.4,51.3 ; D1.2@28,51.675 v1(28.975,51.675) ; L1.1@28.3,47.4 28.3,47.9 28.9,48.5 v1(28.9,48.7) ; v2@31.3,22.4 31.35,22.45 J9.4@31.35,23.85 ; v1(31.8,45.4) 32.85,46.45 C12.1@33.2,46.45 ; C6.1@35.3,41.9 35.3,41.374 34.8,40.874 34.8,40.45 35.05,40.2 C7.1@35.9,40.2 ; C42.1@36.5,48 37.05,48 v1(37.6,48.55) 37.6,50.074 37.97,50.444 U8.3@42.197,50.444 ; R90.1@40.6,13.5 41.119,13.5 42.7,11.919 ; R63.1@40.8,9.7 41.35,9.7 41.95,9.1 C41.1@42.7,9.1 ; v1(41,51.9) 41.156,51.744 U8.1@42.197,51.744 ; v1(42.5,18.4) RA20.1@43.5,18.4 RA20.2@43.5,17.6 RA20.3@43.5,16.8 RA20.4@43.5,16 ; U7.7@44.85,9.1 46.2,9.1 ; v1(47.5,25.8) 47.857,25.8 U9.8@49.4,24.257 ; C40.1@52.4,9.7 C46.1@53.9,9.7 ; U1.U17@55.83,20.016 55.83,19.07 v1(56.6,18.3) 57.3,18.3 C51.2@58.1,17.5 C50.2@60.3,17.5 ; C48.2@75.248,23.531 75.469,23.531 77.3,21.7 v2(78.3,21.7) 78.3,20.298 R58.1@77.2,19.198 ; C22.1@76.4,7 v1(77.356,6.044) ; C28.1@84.9,43.3 84.9,41.428 85.778,40.55 U5.27@86.628,40.55 ; U5.14@97.028,40.55 97.028,38.972 v2@97.4,38.6 ; v1(98.4,27.7) 98.628,27.928 U5.43@98.628,29.25 ; C26.1@98.8,44.1 v2(100.2,44.1) 100.714,43.586 102.386,43.586 C25.1@102.4,43.6 102.7,43.6 103.6,42.7 104.5,42.7 C24.1@104.6,42.8 105.4,42.8 v2(105.9,42.3) C23.1@106.9,42.3 ; v2@101,38.5 v2(101.028,38.528) U5.9@101.028,40.55 ; C19.1@105.2,8 105.486,8.286 U4.43@105.486,9.992 ; C19.1@105.5,8.1 v2@106.6,8.1 ; U5.3@105.828,40.55 v2(105.828,38.828) 106.328,38.828 107.428,39.928 U5.1@107.428,40.55 ; U4.9@107.886,21.292 v2(107.886,19.314) v2@107.9,19.3 ; U4.49@110.286,9.992 110.286,8.886 C18.1@109.5,8.1 v2(112.7,8.1) ; U4.3@112.686,21.292 112.686,19.714 114.3,18.1 117.2,18.1 117.9,17.4 C17.1@117.9,16.8 C16.1@117.9,12.4 ; U4.1@114.286,20.814 U4.1@114.286,21.292 115.114,20.464 115.114,18.1 ; RA17.1@118.402,19.268 RA17.2@118.402,20.068 RA17.3@118.402,20.868 ; RA17.4@118.402,21.668 RA17.3@118.402,20.868 ; v2(119.5,20.9) 119.468,20.868 RA17.3@118.402,20.868
  Top Layer w0.508: C41.1@42.7,9.1 42.7,11.919 43.1,12.319 v2(47.8,12.319) ; 46.2,9.1 47.8,10.7 v2(47.8,12.319) ; C40.1@52.4,9.7 52.4,10.45 52.05,10.8 49.319,10.8 v2(47.8,12.319) ; R76.1@64,12.7 64,13 v1(64.8,13.8) ; R77.1@64.5,15.1 64.5,14.1 v1(64.8,13.8) ; C49.2@66.4,15 65.2,13.8 v1(64.8,13.8)
  other v1: 57.85,26.83 57.83,30.82 35.05,40.3
  other v2: 106.7,8.1 90.2,10.5 117.9,13.8 115.8,18.1 31.3,22.2 97.428,38.528 85.628,40.7
3V3OSC: C53.2 L4.2 R66.1 U1.L4 | length 17.8
  Top Layer w0.127: R66.1@48.3,27.2 48.556,27.456 L4.2@48.556,29.1 49.823,29.1 50.98,30.257 50.98,30.905 C53.2@51.175,31.1 ; C53.2@51.376,31.1 v1(52.16,31.1) ; U1.L4@60.63,30.416 60.63,29.921 v1(60.706,29.845)
  Bottom Layer w0.127: v1(52.16,31.1) 52.16,31.56 53,32.4 54.209,32.4 56.489,30.12 58.162,30.12 58.702,29.58 59.094,29.972 v1@60.579,29.972
5VDC: C13.2 C14.2 C30.1 C31.1 C36.1 C37.1 D2.1 J4.3 J10.1 J10.5 U6.5 U7.5 U10.3 | length 139.5
  Top Layer w0.254: J10.5@10.79,24.836 13.51,24.836 16.164,24.836 C13.2@16.2,24.8 v2(16.2,23.6) v2@16.2,23.4 ; C14.2@17.95,17.6 18.25,17.9 v1(19.2,17.9) ; v2(42,1.27) 42,3.3 42.8,4.1 C36.1@42.8,5.1 ; C36.1@42.8,5.4 C36.1@42.8,5.1 ; C36.1@43.35,4.55 C36.1@42.875,5.025 ; U7.5@48.95,9.6 48.1,9.6 47.7,9.2 47.7,7.4 48.1,7 48.3,7 49.7,5.6 C37.1@49.7,5.3 ; C37.1@49.75,5.3 49.75,4.75 49.127,4.127 43.773,4.127 C36.1@42.875,5.025 ; U6.5@77.488,5.364 76.59,5.364 76.073,4.847 76.073,3.45 76.708,2.815 76.941,2.815 v2(78.613,1.143) ; v2@78.613,1.313 C31.1@79.525,2.225 ; C36.1@42.8,5.1 C36.1@42.875,5.025
  Top Layer w0.508: D2.1@20.25,1.3 20.25,1.65 v2(21.6,3) ; U10.3@29,5.3 v2(30.617,3.683) ; v2(78.613,1.143) 81.879,1.143 82.476,1.74 83.433,0.783 88.5,0.783 90.17,2.453 J4.3@90.17,2.54
  Bottom Layer w0.254: v2(16.2,23.6) 16.9,22.9 16.9,18.9 17.9,17.9 ; v1(19.2,17.9) 17.9,17.9 ; v2(21.6,3) 20.7,3.9 18.3,3.9 15.4,6.8 15.4,16.94 16.36,17.9 17.9,17.9
  Bottom Layer w0.508: v2(21.6,3) 22.283,3.683 v2(30.617,3.683) 32.766,3.683 35.179,1.27 v2(42,1.27) 42.9,1.27 ; 43.101,1.344 69.293,1.344 69.494,1.143 v2@78.359,1.143
A0: RA11.8 U4.15 | length 43
  Top Layer w0.127: RA11.8@82.842,40.316 83.255,40.316 83.947,39.624 ; U4.15@103.086,21.292 103.086,22.151 103.56,22.625 104.725,22.625 106.46,24.36 106.46,26.313 106.434,26.339 106.434,26.599 107.188,27.353 107.188,27.431
  Top Layer w0.254: v2(96.647,37.338) 97.917,36.068 103.759,36.068 107.957,31.87 107.957,28.2 107.188,27.431
  Bottom Layer w0.127: v1(83.947,39.37) 83.947,38.36 84.271,38.036 85.234,38.036 85.361,38.163 85.764,38.163
  Bottom Layer w0.254: 85.828,38.227 86.292,38.227 86.99,38.925 91.516,38.925 92.85,37.592 95.25,37.592 95.504,37.338 v2(96.647,37.338)
A1: RA11.7 U5.15 | length 17
  Top Layer w0.127: RA11.7@82.842,39.516 83.039,39.516 84.074,38.481 v1(84.455,38.481) ; U5.15@96.228,40.194 96.266,40.156 v2(96.266,38.481) v2@96.266,38.227
  Bottom Layer w0.127: v1(84.455,38.481) 85.633,38.481 85.783,38.631 86.175,38.631 86.787,39.243 91.648,39.243 92.918,37.973 96.012,37.973 96.266,38.227 v2(96.266,38.481)
A2: RA11.6 U4.23 U5.23 | length 31.1
  Top Layer w0.127: RA11.6@82.842,38.716 83.077,38.716 83.623,38.17 83.961,38.17 85.428,36.703 v1(85.598,36.703) ; U5.23@89.828,40.194 89.789,40.155 89.789,37.719 v2(90.043,37.465) ; v1(96.647,22.627) 96.647,21.331 U4.23@96.686,21.292
  Bottom Layer w0.127: v1(85.598,36.703) 85.788,36.893 86.504,36.893 87.266,37.655 89.264,37.655 90.043,36.876 90.043,34.417 90.551,33.909 90.551,31.119 91.44,30.23 91.44,28.281 92.406,27.315 92.406,24.921 93.819,23.508 94.497,23.508 94.789,23.216 95.529,23.216 95.654,23.091 95.923,23.091 96.184,22.83 96.184,22.818 96.456,22.818 v1(96.647,22.627)
A3: RA11.5 U4.24 U5.24 | length 30.9
  Top Layer w0.127: RA11.5@82.842,37.916 83.855,37.916 84.498,37.273 84.498,37.174 85.414,36.258 85.534,36.258 86.063,35.73 88.689,35.73 89.028,36.069 v2(89.027,37.084) ; v2(89.027,37.084) U5.24@89.028,40.194 ; v1(95.739,22.646) 95.886,22.499 U4.24@95.886,21.292
  Bottom Layer w0.127: v2(89.027,37.084) 89.027,34.417 89.916,33.528 89.916,31.395 91.186,30.125 91.186,28.176 92.152,27.21 92.152,24.816 93.714,23.254 94.392,23.254 94.684,22.962 95.423,22.962 v1(95.739,22.646)
A4: RA12.8 U4.25 U5.25 | length 52.8
  Top Layer w0.127: RA12.8@74.676,33.204 74.676,34.318 74.867,34.509 74.867,34.89 75.882,35.906 75.882,36.872 75.83,36.924 ; 75.841,36.935 75.012,37.764 73.615,37.764 72.771,38.608 72.771,39.268 72.834,39.331 72.834,39.575 73.095,39.836 73.349,39.836 73.73,40.217 74.123,40.217 74.231,40.325 74.231,40.972 74.492,41.233 75.139,41.233 78.229,44.323 87.884,44.323 88.228,43.979 v2@88.228,36.359 ; v1(94.886,22.517) 95.086,22.317 U4.25@95.086,21.292
  Bottom Layer w0.127: v2(88.265,36.322) 88.265,34.417 89.281,33.401 89.281,31.67 90.932,30.019 90.932,28.071 91.898,27.105 91.898,24.711 93.609,23 94.286,23 94.551,22.735 94.551,22.708 94.579,22.708 94.769,22.517 v1(94.886,22.517)
A5: RA12.7 U4.26 U5.26 | length 37
  Top Layer w0.127: RA12.7@74.46,32.404 74.479,32.385 74.803,32.385 75.1,32.682 75.1,33.006 75.438,33.344 v1(75.438,33.528) ; v2(86.311,33.733) v2(87.886,33.733) ; v2@87.428,37.159 U5.26@87.428,40.194 ; U4.26@94.286,21.292 v1@94.286,22.372
  Bottom Layer w0.127: v1(75.438,33.528) 75.713,33.528 76.221,33.02 78.822,33.02 79.626,32.216 80.547,32.216 80.78,32.448 83.945,32.448 84.665,33.169 ; 84.687,33.147 85.725,33.147 v2(86.311,33.733) ; v2(87.503,37.084) 87.503,34.117 v2(87.886,33.733) 87.886,32.706 90.678,29.914 90.678,27.966 91.644,27 91.644,24.606 93.334,22.916 93.334,22.827 93.609,22.551 v1(94.107,22.551)
A6: RA12.6 U4.29 U5.29 | length 42.5
  Top Layer w0.127: RA12.6@74.663,31.604 74.682,31.623 75.057,31.623 v1(75.184,31.496) ; v1(87.122,30.425) 87.428,30.119 U5.29@87.428,29.25 ; U5.29@87.428,29.92 U5.29@87.428,29.25 ; U4.29@94.286,9.738 U4.29@94.286,9.992 94.286,11.653 90.17,15.769 90.17,17.595 89.725,18.04 89.725,19.615 88.9,20.441 88.9,24.003 88.138,24.765 88.138,27.305 87.428,28.015 87.428,29.175 U5.29@87.428,29.25
  Bottom Layer w0.127: v1@75.12,31.432 v1(75.184,31.496) 75.311,31.623 79.141,31.623 79.311,31.454 80.863,31.454 81.096,31.686 81.464,31.686 81.487,31.663 81.51,31.686 82.486,31.686 83.439,30.734 86.06,30.734 86.455,31.129 87.49,31.129 87.715,30.904 88.243,30.904 89.027,30.12 89.027,29.845 87.702,29.845 v1(87.122,30.425)
A7: RA12.5 U4.30 U5.30 | length 39.1
  Top Layer w0.127: v1(74.295,30.226) RA12.5@74.794,30.725 ; v1@87.997,30.263 88.228,30.032 88.228,28.894 88.392,28.73 88.392,24.87 89.154,24.108 89.154,20.546 89.98,19.72 89.98,18.145 90.424,17.7 90.424,16.023 95.123,11.324 U4.30@95.123,10.054
  Bottom Layer w0.127: v1(74.295,30.226) 74.874,30.226 75.17,29.93 76.764,29.93 77.263,29.431 80.209,29.431 81.83,31.051 82.762,31.051 83.334,30.48 86.165,30.48 86.56,30.875 87.385,30.875 v1@87.885,30.375
  other v1: 88.085,30.35
A8: RA13.8 U4.31 U5.31 | length 25.8
  Top Layer w0.127: RA13.8@84.874,26.092 85.655,26.092 v2(85.979,26.416) ; U5.31@89.028,28.894 89.028,24.764 89.408,24.384 89.408,20.651 90.233,19.826 90.233,18.25 90.678,17.806 90.678,16.128 95.758,11.048 U4.31@95.758,10.308
  Bottom Layer w0.127: v2(85.979,26.416) 88.519,26.416 88.928,26.825 v2(89.01,26.825)
A9: RA13.7 U4.32 U5.32 | length 27.7
  Top Layer w0.127: RA13.7@84.874,25.292 84.982,25.4 v2(86.36,25.4) ; v2@89.662,25.825 89.662,20.756 90.487,19.931 90.487,18.355 90.932,17.911 90.932,16.531 96.686,10.777 U4.32@96.686,9.738 ; v2@89.828,25.825 U5.32@89.828,28.894
  Bottom Layer w0.127: v2@86.233,25.273 86.645,24.861 88.846,24.861 v2(89.81,25.825)
A10: RA13.6 U4.33 U5.33 | length 30.5
  Top Layer w0.127: RA13.6@84.874,24.492 85.871,24.492 v2(86.233,24.13) ; U5.33@90.628,28.894 v2(90.628,26.593) 90.628,25.704 89.916,24.992 89.916,20.861 90.742,20.036 90.742,18.46 91.186,18.016 91.186,16.912 97.536,10.562 U4.33@97.536,10.054
  Bottom Layer w0.127: v2(86.233,24.13) 90.17,24.13 90.805,24.765 90.805,26.416 v2(90.628,26.593)
A11: RA13.5 U4.34 U5.34 | length 39.4
  Top Layer w0.127: RA13.5@84.874,23.692 85.327,23.692 85.65,23.368 86.36,23.368 86.995,24.003 86.995,26.416 86.106,27.305 86.106,30.044 86.937,30.875 90.559,30.875 91.428,30.006 U5.34@91.428,28.894 ; U5.34@91.44,28.882 91.44,26.157 90.17,24.887 90.17,20.967 90.995,20.141 90.995,18.566 91.44,18.121 91.44,17.017 96.752,11.705 97.282,11.705 98.286,10.701 U4.34@98.286,9.738
A13: RA14.7 U4.35 U5.35 | length 37.2
  Top Layer w0.127: RA14.7@83.858,28.848 84.436,28.848 84.582,28.994 84.582,29.464 v1(85.09,29.972) ; v1(85.598,28.829) 85.598,29.486 85.852,29.74 85.852,30.149 86.832,31.129 90.664,31.129 90.678,31.115 91.186,31.115 92.228,30.073 92.228,27.331 91.694,26.797 91.694,26.051 90.424,24.781 90.424,21.072 91.249,20.246 91.249,18.671 91.694,18.226 91.694,17.122 96.476,12.34 97.409,12.34 99.086,10.663 U4.35@99.086,9.738
  Bottom Layer w0.127: v1(85.09,29.972) 85.598,29.464 v1(85.598,28.829)
A14: RA14.6 U4.36 U5.36 | length 37.8
  Top Layer w0.127: RA14.6@83.858,28.048 84.563,28.048 84.836,28.321 84.836,29.083 85.598,29.845 85.598,30.254 86.727,31.383 90.769,31.383 90.783,31.369 92.202,31.369 93.028,30.543 93.028,27.496 91.948,26.416 91.948,25.946 90.678,24.676 90.678,21.177 91.504,20.352 91.504,18.776 91.948,18.332 91.948,17.674 96.647,12.975 97.79,12.975 99.886,10.879 U4.36@99.886,9.738
D0: RA3.8 U4.2 | length 103.2
  Top Layer w0.127: RA3.8@46.613,37.323 47.615,36.322 v2(50.165,36.322) v2@50.292,36.322 ; v1@111.252,38.1 111.823,37.529 111.823,28.441 111.593,28.211 111.593,26.653 112.085,26.162 112.085,24.154 111.891,23.959 111.891,23.591 112.081,23.4 112.081,23.391 112.14,23.332 112.14,23.048 U4.2@113.486,21.702
  Top Layer w0.254: U4.2@113.486,21.292 U4.2@113.486,21.702
  Bottom Layer w0.127: v2(50.165,36.322) 50.292,36.322 47.625,38.989 47.625,43.968 48.679,45.021 71.536,45.021 73.759,47.244 107.74,47.244 110.363,44.621 110.363,39.116 v1(111.379,38.1)
D1: RA3.7 U4.4 | length 107.5
  Top Layer w0.127: v2(43.434,37.613) 44.598,37.613 45.085,38.1 45.593,38.1 45.701,38.208 RA3.7@46.698,38.208 ; U4.4@111.886,21.292 111.886,23.227 111.827,23.286 111.827,23.295 111.637,23.486 111.637,24.064 111.831,24.259 111.831,26.054 111.16,26.725 111.16,37.69 110.934,37.916 110.934,38.284 111.125,38.475 111.125,38.862 v2(111.887,38.862)
  Bottom Layer w0.127: v2(43.434,37.613) 43.862,37.613 45.28,36.195 46.588,36.195 48.006,37.613 48.006,38.249 47.371,38.884 47.371,44.073 48.45,45.152 48.45,45.173 48.553,45.276 71.431,45.276 73.505,47.349 73.653,47.498 107.845,47.498 109.137,46.206 110.617,44.726 110.617,39.624 111.379,38.862 v2(111.887,38.862)
D2: RA3.6 U4.5 | length 106.1
  Top Layer w0.127: v2(44.323,38.481) 45.339,38.481 45.716,38.858 RA3.6@46.898,38.858 ; 110.49,27.5 110.785,27.205 ; 110.785,27.2 110.785,26.525 111.545,25.765 111.545,24.694 111.086,24.235 U4.5@111.086,21.292
  Top Layer w0.254: 110.49,27.5 110.49,38.766 v2@111.427,39.703
  Bottom Layer w0.127: v2(44.323,38.481) 44.323,37.511 45.385,36.449 46.483,36.449 47.752,37.718 47.752,38.144 47.117,38.779 47.117,44.406 47.161,44.45 47.389,44.45 48.197,45.257 48.197,45.278 48.448,45.529 71.326,45.529 73.251,47.454 73.548,47.752 107.95,47.752 109.391,46.311 110.871,44.831 110.998,44.704 110.998,40.132 v2(111.379,39.751)
D3: RA3.5 U4.7 | length 99.3
  Top Layer w0.127: v2(45.212,39.878) 45.974,39.878 46.044,39.808 RA3.5@46.698,39.808 ; 109.093,26.642 109.486,26.249 U4.7@109.486,21.292
  Top Layer w0.254: 109.093,26.642 110.109,27.658 110.109,39.624 v2@112.268,41.783
  Bottom Layer w0.127: v2(45.212,39.878) 45.593,39.878 46.863,41.148 46.863,44.512 47.055,44.704 47.284,44.704 47.942,45.363 47.942,45.383 48.343,45.783 71.22,45.783 73.443,48.006 108.331,48.006 112.141,44.196 v2@112.141,42.206
  other v2: 112.141,41.91
D4: RA4.8 U4.8 | length 109.1
  Top Layer w0.127: v2@45.466,41.656 45.65,41.472 RA4.8@46.698,41.472 ; U4.8@108.686,21.292 108.774,21.38 108.774,24.534 109.145,24.905 109.145,25.895 108.774,26.266 108.774,26.861
  Top Layer w0.254: 108.774,26.861 109.728,27.816 109.728,39.782 111.379,41.433 111.379,42.291 112.268,43.18 114.176,43.18 114.808,43.812 114.808,44.704 v1(111.823,47.688)
  Bottom Layer w0.127: v2(45.339,41.55) 44.323,41.55 42.851,43.022 42.851,44.375 44.196,45.72 46.863,45.72 46.926,45.783 46.926,45.804 47.922,46.799 70.8,46.799 73.022,49.022 108.752,49.022 108.942,48.831 111.188,48.831 111.823,48.197 v1(111.823,47.688)
D5: RA4.7 U4.10 | length 108.4
  Top Layer w0.127: v2(43.434,43.582) 43.434,42.312 43.709,42.037 44.45,42.037 44.835,42.422 RA4.7@46.898,42.422 ; U4.10@107.086,21.292 107.086,22.076 108.16,23.15 108.16,24.28 108.891,25.01 108.891,25.79 108.34,26.341 108.34,26.998 108.41,27.068
  Top Layer w0.254: 108.442,27.068 109.347,27.973 109.347,39.94 110.998,41.591 110.998,42.449 112.364,43.815 113.42,43.815 113.547,43.942 114.046,43.942 v2(114.043,43.945)
  Bottom Layer w0.127: v2(43.434,43.582) 43.434,44.599 44.301,45.466 46.968,45.466 47.18,45.678 47.18,45.699 48.027,46.545 70.905,46.545 73.127,48.768 108.647,48.768 108.837,48.578 110.873,48.578 111.125,48.325 111.125,47.371 114.046,44.45 v2@114.046,43.688
D6: RA4.6 U4.11 | length 103.3
  Top Layer w0.127: v2(44.196,42.799) 44.319,42.922 RA4.6@46.898,42.922 ; U4.11@106.286,21.292 106.286,23.468 106.968,24.15 106.968,26.133 107.95,27.115
  Top Layer w0.254: 107.95,27.115 108.966,28.131 108.966,40.097 110.617,41.748 110.617,43.053 112.014,44.45 v2(113.157,44.45)
  Bottom Layer w0.127: v2(44.196,42.799) 44.196,43.353 45.61,44.767 46.4,44.767 46.845,45.212 47.073,45.212 47.434,45.573 47.434,45.594 48.132,46.291 71.01,46.291 73.232,48.514 108.541,48.514 108.732,48.323 110.172,48.323 110.744,47.752 110.744,46.863 v2(113.157,44.45)
D7: RA4.5 U4.13 | length 96.9
  Top Layer w0.127: v2(45.466,43.815) 45.847,43.815 45.904,43.872 RA4.5@46.698,43.872 ; U4.13@104.686,21.292 104.686,21.986 105.4,22.7 105.4,22.941 106.714,24.255 106.714,26.418 107.569,27.273
  Top Layer w0.254: 107.569,27.273 108.585,28.289 108.585,40.255 110.236,41.906 110.236,43.211 110.617,43.592 110.617,46.863 v2(109.855,47.625)
  Bottom Layer w0.127: v2(45.466,43.815) 45.807,43.815 46.95,44.958 47.179,44.958 47.688,45.468 47.688,45.489 48.237,46.038 71.115,46.038 73.338,48.26 108.436,48.26 109.071,47.625 v2(109.855,47.625)
D8: RA5.8 U4.42 | length 93.9
  Top Layer w0.127: RA5.8@46.618,33.265 47.117,32.766 48.895,32.766 49.911,33.782 v2(50.419,33.782) ; v1(73.279,39.391) 73.279,38.862 74.123,38.018 76.391,38.018 76.581,37.827 76.581,36.576 76.898,36.258 76.898,33.062 77.851,32.109 77.851,26.013 79.248,24.616 79.248,22.886 86.233,15.901 86.233,10.795 87.503,9.525 v2(88.773,9.525) ; v2(103.378,11.705) 103.632,11.705 104.902,10.435 104.902,10.208 U4.42@104.686,9.992
  Bottom Layer w0.127: v2(50.419,33.782) 51.054,34.417 51.054,34.905 51.371,35.222 51.371,36.392 51.244,36.519 51.244,41.067 53.167,42.989 70.722,42.989 72.326,41.385 ; 72.326,41.363 73.005,40.685 73.005,39.792 v1@73.343,39.455 ; v2@88.815,9.483 99.251,9.483 101.981,12.213 102.87,12.213 v2(103.378,11.705)
D9: RA5.7 U4.44 | length 96.7
  Top Layer w0.127: v2@45.593,34.294 RA5.7@46.698,34.294 ; v1(73.914,39.772) 73.914,38.883 74.373,38.424 76.343,38.424 76.835,37.932 76.835,36.681 77.153,36.364 77.153,33.167 78.105,32.214 78.105,26.118 79.502,24.721 79.502,22.991 86.487,16.006 86.487,11.493 v2(87.884,10.096) ; v2(104.653,11.7) 105.542,11.7 106.299,10.943 106.299,10.005 U4.44@106.286,9.992 ; U4.44@106.286,9.738 U4.44@106.286,9.992 ; U4.44@106.286,10.321 U4.44@106.286,9.992
  Bottom Layer w0.127: v2(45.593,34.417) 50.207,34.417 51.117,35.327 51.117,36.287 50.99,36.414 50.99,41.172 53.062,43.243 70.827,43.243 72.581,41.49 ; 72.581,41.468 73.914,40.135 v1(73.914,39.772) ; v2@88.011,10.096 89.192,10.096 89.552,9.737 92.637,9.737 92.933,10.033 94.126,10.033 95.29,11.197 100.584,11.197 100.838,11.451 100.86,11.451 101.876,12.467 103.886,12.467 v2(104.653,11.7)
D10: RA5.6 U4.45 | length 99.1
  Top Layer w0.127: v2(44.704,35.687) 45.339,35.052 46.64,35.052 RA5.6@46.898,34.794 ; v1(74.676,39.772) 75.459,38.989 76.137,38.989 77.089,38.037 77.089,36.786 77.406,36.469 77.406,33.272 78.359,32.32 78.359,26.224 79.756,24.827 79.756,23.096 86.741,16.111 86.741,11.599 87.545,10.795 v2(88.9,10.795) ; v2@106.749,11.128 107.27,10.607 107.086,10.422 U4.45@107.086,9.738
  Bottom Layer w0.127: v2(44.704,35.687) 45.339,35.052 50.483,35.052 50.863,35.432 50.863,36.181 50.736,36.308 50.736,41.277 52.957,43.497 70.932,43.497 72.834,41.595 72.834,41.573 v1@74.656,39.752 ; v2(88.9,10.795) 89.176,11.071 90.891,11.071 91.676,10.287 93.832,10.287 95.25,11.705 100.755,11.705 101.771,12.721 103.991,12.721 104.245,12.467 105.029,12.467 106.368,11.128 v2@106.749,11.128
  other v2: 106.807,11.324
D11: RA5.5 U4.47 | length 98.1
  Top Layer w0.127: v2@44.08,40.397 44.45,40.767 48.387,40.767 48.514,40.894 v2(49.657,40.894) ; v2(45.593,37.084) 45.593,36.068 45.917,35.744 RA5.5@46.698,35.744 ; v1(74.676,40.788) 74.676,40.448 75.754,39.37 76.116,39.37 77.343,38.143 77.343,36.892 77.66,36.574 77.66,33.377 78.613,32.425 78.613,26.329 80.01,24.932 80.01,23.201 86.995,16.216 86.995,12.319 v2(87.884,11.43) ; v2(107.95,11.578) 108.686,10.842 U4.47@108.686,9.738
  Bottom Layer w0.127: 44.069,40.005 45.847,38.227 v2@45.847,37.211 ; v2(49.657,40.894) 49.657,41.157 50.257,41.157 52.851,43.752 71.037,43.752 73.088,41.7 ; 73.088,41.679 73.979,40.788 v1(74.676,40.788) ; v2(87.884,11.43) 90.892,11.43 91.506,10.816 93.853,10.816 94.996,11.959 100.649,11.959 101.665,12.975 104.096,12.975 104.35,12.721 105.134,12.721 105.896,11.959 107.569,11.959 v2(107.95,11.578)
  other v2: 44.069,40.407
D12: RA6.8 U4.48 | length 54.7
  Top Layer w0.127: RA6.8@79.702,39.972 79.456,39.726 79.456,39.451 79.24,39.235 79.12,39.235 78.676,38.792 78.676,36.138 78.74,36.074 78.74,34.47 78.703,34.433 79.725,33.41 79.725,26.656 81.153,25.229 81.153,23.578 88.011,16.72 88.011,14.499 88.773,13.737 v1(89.535,13.737) ; v2(107.37,13.301) 109.486,11.185 U4.48@109.486,9.738
  Bottom Layer w0.127: v1(89.535,13.737) 89.577,13.779 100.186,13.779 100.778,14.372 106.299,14.372 v2(107.37,13.301)
D13: RA6.7 U4.50 | length 57.8
  Top Layer w0.127: RA6.7@78.886,39.988 78.886,39.361 78.422,38.897 78.422,36.033 78.486,35.969 78.486,34.575 78.422,34.512 78.422,34.353 79.471,33.305 79.471,26.551 80.899,25.123 80.899,23.472 87.757,16.614 87.757,13.886 88.668,12.975 v1(89.535,12.975) ; v2(106.299,13.483) 106.807,13.991 109.347,13.991 111.086,12.252 U4.50@111.086,9.738
  Bottom Layer w0.127: v1(89.535,12.975) 89.568,13.008 100.236,13.008 100.965,13.737 106.045,13.737 v2(106.299,13.483)
D14: RA6.6 U4.51 | length 58.3
  Top Layer w0.127: RA6.6@78.086,39.988 78.086,38.394 78.168,38.312 78.168,35.927 78.232,35.864 78.232,34.68 78.168,34.617 78.168,34.121 79.217,33.072 79.217,26.446 80.645,25.018 80.645,23.367 87.503,16.509 87.503,13.781 89.071,12.213 v1(89.789,12.213) ; U4.51@111.886,9.738 111.886,11.198 v2(111.95,11.134)
  Bottom Layer w0.127: v1(89.789,12.213) 90.33,12.754 100.726,12.754 101.455,13.483 104.307,13.483 104.561,13.229 105.345,13.229 106.107,12.467 109.96,12.467 110.341,12.086 110.998,12.086 v2(111.95,11.134)